# EAGLE board Triple_Axis_Accelerometer_-_Gyro_Breakout_-_MPU-6050-Panel-v12 (EAGLE 7.3.0), part 1 of 4
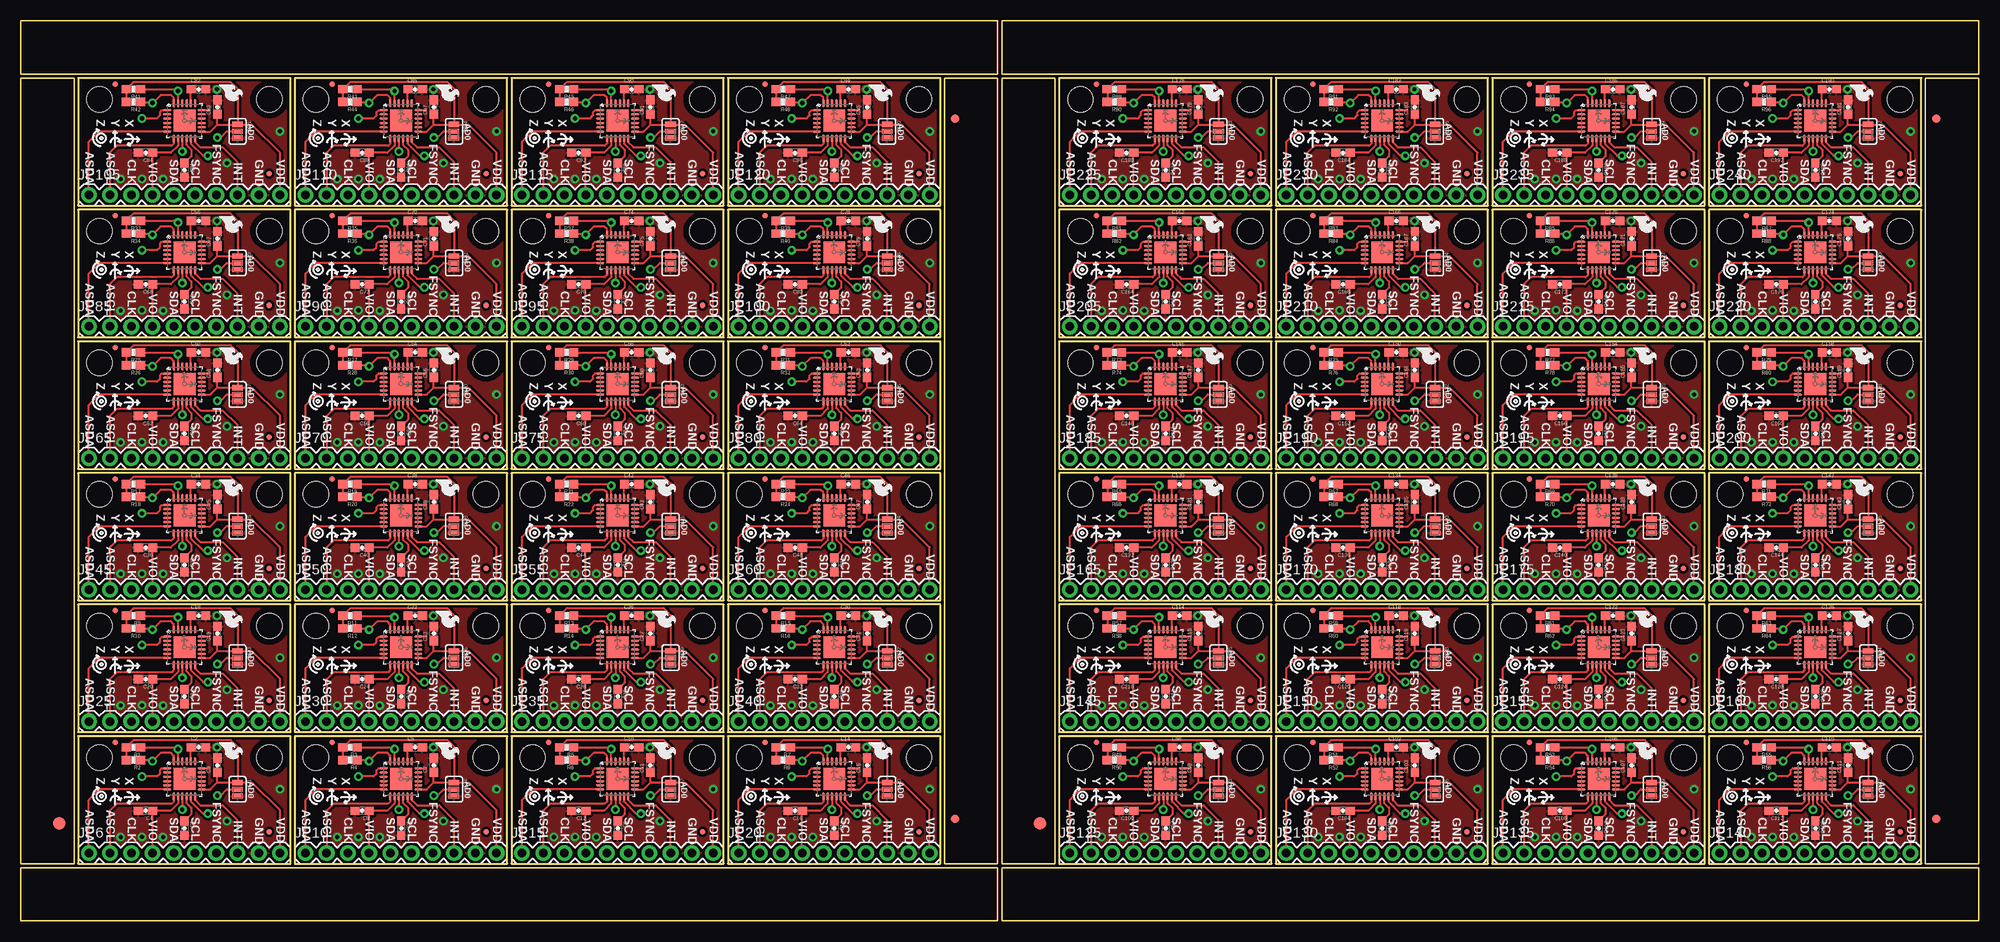
[diagram p0: board, top side]
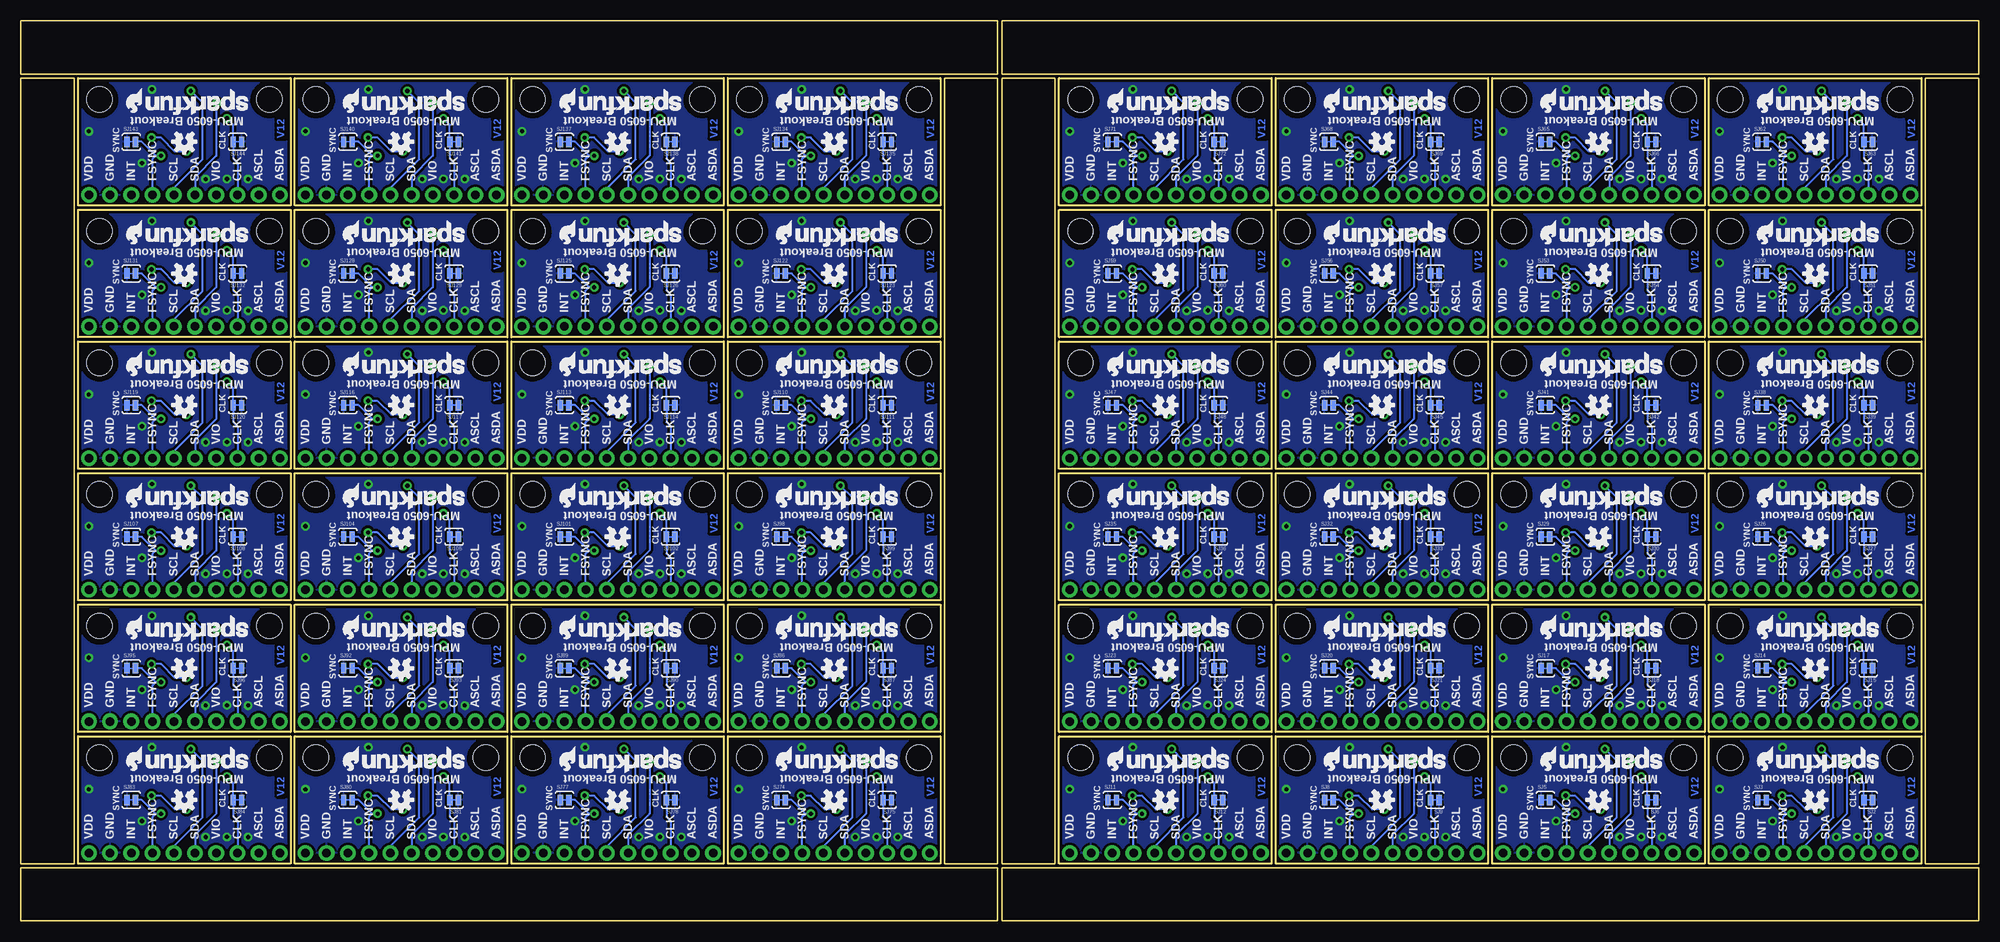
[diagram p1: board, bottom side, seen from below]

Size 234.19 x 107.7 mm. Coordinates in mm from the lower left corner, seen from the top.
Outline: 232 segments
Copper layers (1*16): Top 0.035mm / dielectric 1.5mm / Bottom 0.035mm
Design rules "SparkFun *": minimum track width 7mil, minimum drill 15mil, track to track 8mil, track to pad 8mil, pad to pad 8mil, via to via 8mil, smd to smd 8mil, copper to edge 8mil, drill to drill 8mil, minimum pad ring 12mil, minimum via ring 10mil, stop-mask expansion 4mil, vias tented up to drill 20mil, thermal gap 10mil
Net classes: 0 Default: width 0.203 mm; 1 vcc: width 0.254 mm; 2 GND: width 0.813 mm
tRestrict: area 21.4,18.4 to 22,18.7; area 47.3,18.4 to 47.9,18.7; area 73.2,18.4 to 73.8,18.7; area 99.1,18.4 to 99.7,18.7; area 21.4,34.2 to 22,34.4; area 47.3,34.2 to 47.9,34.4; area 73.2,34.2 to 73.8,34.4; area 99.1,34.2 to 99.7,34.4; area 21.4,49.9 to 22,50.2; area 47.3,49.9 to 47.9,50.2; area 73.2,49.9 to 73.8,50.2; area 99.1,49.9 to 99.7,50.2; 36 more areas

## Footprints (pad centres in the part's own frame; a part is rotated, then mirrored left to right if it is on the bottom)
0603-CAP = smd 1.1 x 1: 1 -0.85,0; 2 0.85,0
FIDUCIAL-1.5X3 = smd 1.5 x 1.5: 1 0,0
FIDUCIAL-1X2 = smd 1 x 1: 1 0,0
STAND-OFF-TIGHT = hole 3.048: 0,0
MICRO-FIDUCIAL = smd 0.635 x 0.635: 1 0,0
1X10 = drill 1.016 pad 1.88: 1 0,0; 2 2.54,0; 3 5.08,0; 4 7.62,0; 5 10.16,0; 6 12.7,0; 7 15.24,0; 8 17.78,0; 9 20.32,0; 10 22.86,0
0603-RES = smd 1.1 x 1: 1 -0.85,0; 2 0.85,0
SJ_3_PASTE2&3 = smd 0.635 x 1.27: 1 -0.813,0; 2 0,0; 3 0.813,0
SJ_2S-TRACE = smd 0.635 x 1.27: 1 -0.508,0; 2 0.508,0
QFN-24-4MM2 = smd 1.016 x 0.254: 1 -2.066,1.257; 2 -2.066,0.75; 3 -2.066,0.247; 4 -2.066,-0.287; 5 -2.066,-0.792; 6 -2.066,-1.297; 13 2.086,-1.297; 14 2.086,-0.792; 15 2.086,-0.287; 16 2.086,0.247; 17 2.086,0.75; 18 2.086,1.257 | smd 0.254 x 1.016: 7 -1.267,-2.122; 8 -0.762,-2.122; 9 -0.258,-2.122; 10 0.278,-2.122; 11 0.78,-2.122; 12 1.287,-2.122; 19 1.287,2.082; 20 0.78,2.082; 21 0.278,2.082; 22 -0.258,2.082; 23 -0.762,2.082; 24 -1.267,2.082 | smd 2.616 x 2.616: P$1 0.02,-0.01

## Placement (x,y rotation side)
C1  0.1uF  [0603-CAP]  19.58,11.1 270 top
C2  2.2nF  [0603-CAP]  21.26,20.78 0 top
C3  0.1uF  [0603-CAP]  23.5,18.64 90 top
C4  10nF  [0603-CAP]  14.91,13.18 180 top
C5  0.1uF  [0603-CAP]  45.49,11.1 270 top
C6  2.2nF  [0603-CAP]  47.17,20.78 0 top
C7  0.1uF  [0603-CAP]  49.4,18.64 90 top
C8  10nF  [0603-CAP]  40.82,13.18 180 top
C9  0.1uF  [0603-CAP]  71.4,11.1 270 top
C10  2.2nF  [0603-CAP]  73.08,20.78 0 top
C11  0.1uF  [0603-CAP]  75.31,18.64 90 top
C12  10nF  [0603-CAP]  66.73,13.18 180 top
C13  0.1uF  [0603-CAP]  97.31,11.1 270 top
C14  2.2nF  [0603-CAP]  98.98,20.78 0 top
C15  0.1uF  [0603-CAP]  101.22,18.64 90 top
C16  10nF  [0603-CAP]  92.63,13.18 180 top
C17  0.1uF  [0603-CAP]  19.58,26.85 270 top
C18  2.2nF  [0603-CAP]  21.26,36.53 0 top
C19  0.1uF  [0603-CAP]  23.5,34.39 90 top
C20  10nF  [0603-CAP]  14.91,28.93 180 top
C21  0.1uF  [0603-CAP]  45.49,26.85 270 top
C22  2.2nF  [0603-CAP]  47.17,36.53 0 top
C23  0.1uF  [0603-CAP]  49.4,34.39 90 top
C24  10nF  [0603-CAP]  40.82,28.93 180 top
C25  0.1uF  [0603-CAP]  71.4,26.85 270 top
C26  2.2nF  [0603-CAP]  73.08,36.53 0 top
C27  0.1uF  [0603-CAP]  75.31,34.39 90 top
C28  10nF  [0603-CAP]  66.73,28.93 180 top
C29  0.1uF  [0603-CAP]  97.31,26.85 270 top
C30  2.2nF  [0603-CAP]  98.98,36.53 0 top
C31  0.1uF  [0603-CAP]  101.22,34.39 90 top
C32  10nF  [0603-CAP]  92.63,28.93 180 top
C33  0.1uF  [0603-CAP]  19.58,42.6 270 top
C34  2.2nF  [0603-CAP]  21.26,52.27 0 top
C35  0.1uF  [0603-CAP]  23.5,50.14 90 top
C36  10nF  [0603-CAP]  14.91,44.68 180 top
C37  0.1uF  [0603-CAP]  45.49,42.6 270 top
C38  2.2nF  [0603-CAP]  47.17,52.27 0 top
C39  0.1uF  [0603-CAP]  49.4,50.14 90 top
C40  10nF  [0603-CAP]  40.82,44.68 180 top
C41  0.1uF  [0603-CAP]  71.4,42.6 270 top
C42  2.2nF  [0603-CAP]  73.08,52.27 0 top
C43  0.1uF  [0603-CAP]  75.31,50.14 90 top
C44  10nF  [0603-CAP]  66.73,44.68 180 top
C45  0.1uF  [0603-CAP]  97.31,42.6 270 top
C46  2.2nF  [0603-CAP]  98.98,52.27 0 top
C47  0.1uF  [0603-CAP]  101.22,50.14 90 top
C48  10nF  [0603-CAP]  92.63,44.68 180 top
C49  0.1uF  [0603-CAP]  19.58,58.34 270 top
C50  2.2nF  [0603-CAP]  21.26,68.02 0 top
C51  0.1uF  [0603-CAP]  23.5,65.89 90 top
C52  10nF  [0603-CAP]  14.91,60.43 180 top
C53  0.1uF  [0603-CAP]  45.49,58.34 270 top
C54  2.2nF  [0603-CAP]  47.17,68.02 0 top
C55  0.1uF  [0603-CAP]  49.4,65.89 90 top
C56  10nF  [0603-CAP]  40.82,60.43 180 top
C57  0.1uF  [0603-CAP]  71.4,58.34 270 top
C58  2.2nF  [0603-CAP]  73.08,68.02 0 top
C59  0.1uF  [0603-CAP]  75.31,65.89 90 top
C60  10nF  [0603-CAP]  66.73,60.43 180 top
C61  0.1uF  [0603-CAP]  97.31,58.34 270 top
C62  2.2nF  [0603-CAP]  98.98,68.02 0 top
C63  0.1uF  [0603-CAP]  101.22,65.89 90 top
C64  10nF  [0603-CAP]  92.63,60.43 180 top
C65  0.1uF  [0603-CAP]  19.58,74.09 270 top
C66  2.2nF  [0603-CAP]  21.26,83.77 0 top
C67  0.1uF  [0603-CAP]  23.5,81.64 90 top
C68  10nF  [0603-CAP]  14.91,76.17 180 top
C69  0.1uF  [0603-CAP]  45.49,74.09 270 top
C70  2.2nF  [0603-CAP]  47.17,83.77 0 top
C71  0.1uF  [0603-CAP]  49.4,81.64 90 top
C72  10nF  [0603-CAP]  40.82,76.17 180 top
C73  0.1uF  [0603-CAP]  71.4,74.09 270 top
C74  2.2nF  [0603-CAP]  73.08,83.77 0 top
C75  0.1uF  [0603-CAP]  75.31,81.64 90 top
C76  10nF  [0603-CAP]  66.73,76.17 180 top
C77  0.1uF  [0603-CAP]  97.31,74.09 270 top
C78  2.2nF  [0603-CAP]  98.98,83.77 0 top
C79  0.1uF  [0603-CAP]  101.22,81.64 90 top
C80  10nF  [0603-CAP]  92.63,76.17 180 top
C81  0.1uF  [0603-CAP]  19.58,89.84 270 top
C82  2.2nF  [0603-CAP]  21.26,99.52 0 top
C83  0.1uF  [0603-CAP]  23.5,97.38 90 top
C84  10nF  [0603-CAP]  14.91,91.92 180 top
C85  0.1uF  [0603-CAP]  45.49,89.84 270 top
C86  2.2nF  [0603-CAP]  47.17,99.52 0 top
C87  0.1uF  [0603-CAP]  49.4,97.38 90 top
C88  10nF  [0603-CAP]  40.82,91.92 180 top
C89  0.1uF  [0603-CAP]  71.4,89.84 270 top
C90  2.2nF  [0603-CAP]  73.08,99.52 0 top
C91  0.1uF  [0603-CAP]  75.31,97.38 90 top
C92  10nF  [0603-CAP]  66.73,91.92 180 top
C93  0.1uF  [0603-CAP]  97.31,89.84 270 top
C94  2.2nF  [0603-CAP]  98.98,99.52 0 top
C95  0.1uF  [0603-CAP]  101.22,97.38 90 top
C96  10nF  [0603-CAP]  92.63,91.92 180 top
C97  0.1uF  [0603-CAP]  136.93,11.1 270 top
C98  2.2nF  [0603-CAP]  138.61,20.78 0 top
C99  0.1uF  [0603-CAP]  140.84,18.64 90 top
C100  10nF  [0603-CAP]  132.26,13.18 180 top
C101  0.1uF  [0603-CAP]  162.84,11.1 270 top
C102  2.2nF  [0603-CAP]  164.52,20.78 0 top
C103  0.1uF  [0603-CAP]  166.75,18.64 90 top
C104  10nF  [0603-CAP]  158.17,13.18 180 top
C105  0.1uF  [0603-CAP]  188.75,11.1 270 top
C106  2.2nF  [0603-CAP]  190.42,20.78 0 top
C107  0.1uF  [0603-CAP]  192.66,18.64 90 top
C108  10nF  [0603-CAP]  184.07,13.18 180 top
C109  0.1uF  [0603-CAP]  214.66,11.1 270 top
C110  2.2nF  [0603-CAP]  216.33,20.78 0 top
C111  0.1uF  [0603-CAP]  218.57,18.64 90 top
C112  10nF  [0603-CAP]  209.98,13.18 180 top
C113  0.1uF  [0603-CAP]  136.93,26.85 270 top
C114  2.2nF  [0603-CAP]  138.61,36.53 0 top
C115  0.1uF  [0603-CAP]  140.84,34.39 90 top
C116  10nF  [0603-CAP]  132.26,28.93 180 top
C117  0.1uF  [0603-CAP]  162.84,26.85 270 top
C118  2.2nF  [0603-CAP]  164.52,36.53 0 top
C119  0.1uF  [0603-CAP]  166.75,34.39 90 top
C120  10nF  [0603-CAP]  158.17,28.93 180 top
C121  0.1uF  [0603-CAP]  188.75,26.85 270 top
C122  2.2nF  [0603-CAP]  190.42,36.53 0 top
C123  0.1uF  [0603-CAP]  192.66,34.39 90 top
C124  10nF  [0603-CAP]  184.07,28.93 180 top
C125  0.1uF  [0603-CAP]  214.66,26.85 270 top
C126  2.2nF  [0603-CAP]  216.33,36.53 0 top
C127  0.1uF  [0603-CAP]  218.57,34.39 90 top
C128  10nF  [0603-CAP]  209.98,28.93 180 top
C129  0.1uF  [0603-CAP]  136.93,42.6 270 top
C130  2.2nF  [0603-CAP]  138.61,52.27 0 top
C131  0.1uF  [0603-CAP]  140.84,50.14 90 top
C132  10nF  [0603-CAP]  132.26,44.68 180 top
C133  0.1uF  [0603-CAP]  162.84,42.6 270 top
C134  2.2nF  [0603-CAP]  164.52,52.27 0 top
C135  0.1uF  [0603-CAP]  166.75,50.14 90 top
C136  10nF  [0603-CAP]  158.17,44.68 180 top
C137  0.1uF  [0603-CAP]  188.75,42.6 270 top
C138  2.2nF  [0603-CAP]  190.42,52.27 0 top
C139  0.1uF  [0603-CAP]  192.66,50.14 90 top
C140  10nF  [0603-CAP]  184.07,44.68 180 top
C141  0.1uF  [0603-CAP]  214.66,42.6 270 top
C142  2.2nF  [0603-CAP]  216.33,52.27 0 top
C143  0.1uF  [0603-CAP]  218.57,50.14 90 top
C144  10nF  [0603-CAP]  209.98,44.68 180 top
C145  0.1uF  [0603-CAP]  136.93,58.34 270 top
C146  2.2nF  [0603-CAP]  138.61,68.02 0 top
C147  0.1uF  [0603-CAP]  140.84,65.89 90 top
C148  10nF  [0603-CAP]  132.26,60.43 180 top
C149  0.1uF  [0603-CAP]  162.84,58.34 270 top
C150  2.2nF  [0603-CAP]  164.52,68.02 0 top
C151  0.1uF  [0603-CAP]  166.75,65.89 90 top
C152  10nF  [0603-CAP]  158.17,60.43 180 top
C153  0.1uF  [0603-CAP]  188.75,58.34 270 top
C154  2.2nF  [0603-CAP]  190.42,68.02 0 top
C155  0.1uF  [0603-CAP]  192.66,65.89 90 top
C156  10nF  [0603-CAP]  184.07,60.43 180 top
C157  0.1uF  [0603-CAP]  214.66,58.34 270 top
C158  2.2nF  [0603-CAP]  216.33,68.02 0 top
C159  0.1uF  [0603-CAP]  218.57,65.89 90 top
C160  10nF  [0603-CAP]  209.98,60.43 180 top
C161  0.1uF  [0603-CAP]  136.93,74.09 270 top
C162  2.2nF  [0603-CAP]  138.61,83.77 0 top
C163  0.1uF  [0603-CAP]  140.84,81.64 90 top
C164  10nF  [0603-CAP]  132.26,76.17 180 top
C165  0.1uF  [0603-CAP]  162.84,74.09 270 top
C166  2.2nF  [0603-CAP]  164.52,83.77 0 top
C167  0.1uF  [0603-CAP]  166.75,81.64 90 top
C168  10nF  [0603-CAP]  158.17,76.17 180 top
C169  0.1uF  [0603-CAP]  188.75,74.09 270 top
C170  2.2nF  [0603-CAP]  190.42,83.77 0 top
C171  0.1uF  [0603-CAP]  192.66,81.64 90 top
C172  10nF  [0603-CAP]  184.07,76.17 180 top
C173  0.1uF  [0603-CAP]  214.66,74.09 270 top
C174  2.2nF  [0603-CAP]  216.33,83.77 0 top
C175  0.1uF  [0603-CAP]  218.57,81.64 90 top
C176  10nF  [0603-CAP]  209.98,76.17 180 top
C177  0.1uF  [0603-CAP]  136.93,89.84 270 top
C178  2.2nF  [0603-CAP]  138.61,99.52 0 top
C179  0.1uF  [0603-CAP]  140.84,97.38 90 top
C180  10nF  [0603-CAP]  132.26,91.92 180 top
C181  0.1uF  [0603-CAP]  162.84,89.84 270 top
C182  2.2nF  [0603-CAP]  164.52,99.52 0 top
C183  0.1uF  [0603-CAP]  166.75,97.38 90 top
C184  10nF  [0603-CAP]  158.17,91.92 180 top
C185  0.1uF  [0603-CAP]  188.75,89.84 270 top
C186  2.2nF  [0603-CAP]  190.42,99.52 0 top
C187  0.1uF  [0603-CAP]  192.66,97.38 90 top
C188  10nF  [0603-CAP]  184.07,91.92 180 top
C189  0.1uF  [0603-CAP]  214.66,89.84 270 top
C190  2.2nF  [0603-CAP]  216.33,99.52 0 top
C191  0.1uF  [0603-CAP]  218.57,97.38 90 top
C192  10nF  [0603-CAP]  209.98,91.92 180 top
E$1  [FIDUCIAL-1.5X3]  4.57,11.68 0 top
E$2  [FIDUCIAL-1X2]  229.11,12.19 0 top
E$3  [FIDUCIAL-1X2]  229.11,96.01 180 top
E$4  [FIDUCIAL-1X2]  111.76,12.19 0 top
E$5  [FIDUCIAL-1X2]  111.76,96.01 180 top
E$6  [FIDUCIAL-1.5X3]  121.92,11.68 0 top
JP1  STAND-OFFTIGHT  [STAND-OFF-TIGHT]  55.63,19.56 270 top
JP2  FIDUCIALUFIDUCIAL  [MICRO-FIDUCIAL]  11.3,21.39 270 top
JP3  STAND-OFFTIGHT  [STAND-OFF-TIGHT]  29.72,19.56 270 top
JP4  STAND-OFFTIGHT  [STAND-OFF-TIGHT]  9.4,19.56 270 top
JP5  FIDUCIALUFIDUCIAL  [MICRO-FIDUCIAL]  29.72,10.67 270 top
JP6  M10"  [1X10]  8.13,8.13 0 top
JP7  STAND-OFFTIGHT  [STAND-OFF-TIGHT]  35.31,19.56 270 top
JP8  FIDUCIALUFIDUCIAL  [MICRO-FIDUCIAL]  37.21,21.39 270 top
JP9  FIDUCIALUFIDUCIAL  [MICRO-FIDUCIAL]  55.63,10.67 270 top
JP10  M10"  [1X10]  34.04,8.13 0 top
JP11  STAND-OFFTIGHT  [STAND-OFF-TIGHT]  81.53,19.56 270 top
JP12  STAND-OFFTIGHT  [STAND-OFF-TIGHT]  61.21,19.56 270 top
JP13  FIDUCIALUFIDUCIAL  [MICRO-FIDUCIAL]  63.12,21.39 270 top
JP14  FIDUCIALUFIDUCIAL  [MICRO-FIDUCIAL]  81.53,10.67 270 top
JP15  M10"  [1X10]  59.94,8.13 0 top
JP16  STAND-OFFTIGHT  [STAND-OFF-TIGHT]  107.44,19.56 270 top
JP17  STAND-OFFTIGHT  [STAND-OFF-TIGHT]  87.12,19.56 270 top
JP18  FIDUCIALUFIDUCIAL  [MICRO-FIDUCIAL]  89.03,21.39 270 top
JP19  FIDUCIALUFIDUCIAL  [MICRO-FIDUCIAL]  107.44,10.67 270 top
JP20  M10"  [1X10]  85.85,8.13 0 top
JP21  STAND-OFFTIGHT  [STAND-OFF-TIGHT]  29.72,35.31 270 top
JP22  STAND-OFFTIGHT  [STAND-OFF-TIGHT]  9.4,35.31 270 top
JP23  FIDUCIALUFIDUCIAL  [MICRO-FIDUCIAL]  11.3,37.13 270 top
JP24  FIDUCIALUFIDUCIAL  [MICRO-FIDUCIAL]  29.72,26.42 270 top
JP25  M10"  [1X10]  8.13,23.88 0 top
JP26  STAND-OFFTIGHT  [STAND-OFF-TIGHT]  55.63,35.31 270 top
JP27  STAND-OFFTIGHT  [STAND-OFF-TIGHT]  35.31,35.31 270 top
JP28  FIDUCIALUFIDUCIAL  [MICRO-FIDUCIAL]  37.21,37.13 270 top
JP29  FIDUCIALUFIDUCIAL  [MICRO-FIDUCIAL]  55.63,26.42 270 top
JP30  M10"  [1X10]  34.04,23.88 0 top
JP31  STAND-OFFTIGHT  [STAND-OFF-TIGHT]  81.53,35.31 270 top
JP32  STAND-OFFTIGHT  [STAND-OFF-TIGHT]  61.21,35.31 270 top
JP33  FIDUCIALUFIDUCIAL  [MICRO-FIDUCIAL]  63.12,37.13 270 top
JP34  FIDUCIALUFIDUCIAL  [MICRO-FIDUCIAL]  81.53,26.42 270 top
JP35  M10"  [1X10]  59.94,23.88 0 top
JP36  STAND-OFFTIGHT  [STAND-OFF-TIGHT]  107.44,35.31 270 top
JP37  STAND-OFFTIGHT  [STAND-OFF-TIGHT]  87.12,35.31 270 top
JP38  FIDUCIALUFIDUCIAL  [MICRO-FIDUCIAL]  89.03,37.13 270 top
JP39  FIDUCIALUFIDUCIAL  [MICRO-FIDUCIAL]  107.44,26.42 270 top
JP40  M10"  [1X10]  85.85,23.88 0 top
JP41  STAND-OFFTIGHT  [STAND-OFF-TIGHT]  29.72,51.05 270 top
JP42  STAND-OFFTIGHT  [STAND-OFF-TIGHT]  9.4,51.05 270 top
JP43  FIDUCIALUFIDUCIAL  [MICRO-FIDUCIAL]  11.3,52.88 270 top
JP44  FIDUCIALUFIDUCIAL  [MICRO-FIDUCIAL]  29.72,42.16 270 top
JP45  M10"  [1X10]  8.13,39.62 0 top
JP46  STAND-OFFTIGHT  [STAND-OFF-TIGHT]  55.63,51.05 270 top
JP47  STAND-OFFTIGHT  [STAND-OFF-TIGHT]  35.31,51.05 270 top
JP48  FIDUCIALUFIDUCIAL  [MICRO-FIDUCIAL]  37.21,52.88 270 top
JP49  FIDUCIALUFIDUCIAL  [MICRO-FIDUCIAL]  55.63,42.16 270 top
JP50  M10"  [1X10]  34.04,39.62 0 top
JP51  STAND-OFFTIGHT  [STAND-OFF-TIGHT]  81.53,51.05 270 top
JP52  STAND-OFFTIGHT  [STAND-OFF-TIGHT]  61.21,51.05 270 top
JP53  FIDUCIALUFIDUCIAL  [MICRO-FIDUCIAL]  63.12,52.88 270 top
JP54  FIDUCIALUFIDUCIAL  [MICRO-FIDUCIAL]  81.53,42.16 270 top
JP55  M10"  [1X10]  59.94,39.62 0 top
JP56  STAND-OFFTIGHT  [STAND-OFF-TIGHT]  107.44,51.05 270 top
JP57  STAND-OFFTIGHT  [STAND-OFF-TIGHT]  87.12,51.05 270 top
JP58  FIDUCIALUFIDUCIAL  [MICRO-FIDUCIAL]  89.03,52.88 270 top
JP59  FIDUCIALUFIDUCIAL  [MICRO-FIDUCIAL]  107.44,42.16 270 top
JP60  M10"  [1X10]  85.85,39.62 0 top
JP61  STAND-OFFTIGHT  [STAND-OFF-TIGHT]  29.72,66.8 270 top
JP62  STAND-OFFTIGHT  [STAND-OFF-TIGHT]  9.4,66.8 270 top
JP63  FIDUCIALUFIDUCIAL  [MICRO-FIDUCIAL]  11.3,68.63 270 top
JP64  FIDUCIALUFIDUCIAL  [MICRO-FIDUCIAL]  29.72,57.91 270 top
JP65  M10"  [1X10]  8.13,55.37 0 top
JP66  STAND-OFFTIGHT  [STAND-OFF-TIGHT]  55.63,66.8 270 top
JP67  STAND-OFFTIGHT  [STAND-OFF-TIGHT]  35.31,66.8 270 top
JP68  FIDUCIALUFIDUCIAL  [MICRO-FIDUCIAL]  37.21,68.63 270 top
JP69  FIDUCIALUFIDUCIAL  [MICRO-FIDUCIAL]  55.63,57.91 270 top
JP70  M10"  [1X10]  34.04,55.37 0 top
JP71  STAND-OFFTIGHT  [STAND-OFF-TIGHT]  81.53,66.8 270 top
JP72  STAND-OFFTIGHT  [STAND-OFF-TIGHT]  61.21,66.8 270 top
JP73  FIDUCIALUFIDUCIAL  [MICRO-FIDUCIAL]  63.12,68.63 270 top
JP74  FIDUCIALUFIDUCIAL  [MICRO-FIDUCIAL]  81.53,57.91 270 top
JP75  M10"  [1X10]  59.94,55.37 0 top
JP76  STAND-OFFTIGHT  [STAND-OFF-TIGHT]  107.44,66.8 270 top
JP77  STAND-OFFTIGHT  [STAND-OFF-TIGHT]  87.12,66.8 270 top
JP78  FIDUCIALUFIDUCIAL  [MICRO-FIDUCIAL]  89.03,68.63 270 top
JP79  FIDUCIALUFIDUCIAL  [MICRO-FIDUCIAL]  107.44,57.91 270 top
JP80  M10"  [1X10]  85.85,55.37 0 top
JP81  STAND-OFFTIGHT  [STAND-OFF-TIGHT]  29.72,82.55 270 top
JP82  STAND-OFFTIGHT  [STAND-OFF-TIGHT]  9.4,82.55 270 top
JP83  FIDUCIALUFIDUCIAL  [MICRO-FIDUCIAL]  11.3,84.38 270 top
JP84  FIDUCIALUFIDUCIAL  [MICRO-FIDUCIAL]  29.72,73.66 270 top
JP85  M10"  [1X10]  8.13,71.12 0 top
JP86  STAND-OFFTIGHT  [STAND-OFF-TIGHT]  55.63,82.55 270 top
JP87  STAND-OFFTIGHT  [STAND-OFF-TIGHT]  35.31,82.55 270 top
JP88  FIDUCIALUFIDUCIAL  [MICRO-FIDUCIAL]  37.21,84.38 270 top
JP89  FIDUCIALUFIDUCIAL  [MICRO-FIDUCIAL]  55.63,73.66 270 top
JP90  M10"  [1X10]  34.04,71.12 0 top
JP91  STAND-OFFTIGHT  [STAND-OFF-TIGHT]  81.53,82.55 270 top
JP92  STAND-OFFTIGHT  [STAND-OFF-TIGHT]  61.21,82.55 270 top
JP93  FIDUCIALUFIDUCIAL  [MICRO-FIDUCIAL]  63.12,84.38 270 top
JP94  FIDUCIALUFIDUCIAL  [MICRO-FIDUCIAL]  81.53,73.66 270 top
JP95  M10"  [1X10]  59.94,71.12 0 top
JP96  STAND-OFFTIGHT  [STAND-OFF-TIGHT]  107.44,82.55 270 top
JP97  STAND-OFFTIGHT  [STAND-OFF-TIGHT]  87.12,82.55 270 top
JP98  FIDUCIALUFIDUCIAL  [MICRO-FIDUCIAL]  89.03,84.38 270 top
JP99  FIDUCIALUFIDUCIAL  [MICRO-FIDUCIAL]  107.44,73.66 270 top
JP100  M10"  [1X10]  85.85,71.12 0 top
JP101  STAND-OFFTIGHT  [STAND-OFF-TIGHT]  29.72,98.3 270 top
JP102  STAND-OFFTIGHT  [STAND-OFF-TIGHT]  9.4,98.3 270 top
JP103  FIDUCIALUFIDUCIAL  [MICRO-FIDUCIAL]  11.3,100.13 270 top
JP104  FIDUCIALUFIDUCIAL  [MICRO-FIDUCIAL]  29.72,89.41 270 top
JP105  M10"  [1X10]  8.13,86.87 0 top
JP106  STAND-OFFTIGHT  [STAND-OFF-TIGHT]  55.63,98.3 270 top
JP107  STAND-OFFTIGHT  [STAND-OFF-TIGHT]  35.31,98.3 270 top
JP108  FIDUCIALUFIDUCIAL  [MICRO-FIDUCIAL]  37.21,100.13 270 top
JP109  FIDUCIALUFIDUCIAL  [MICRO-FIDUCIAL]  55.63,89.41 270 top
JP110  M10"  [1X10]  34.04,86.87 0 top
JP111  STAND-OFFTIGHT  [STAND-OFF-TIGHT]  81.53,98.3 270 top
JP112  STAND-OFFTIGHT  [STAND-OFF-TIGHT]  61.21,98.3 270 top
JP113  FIDUCIALUFIDUCIAL  [MICRO-FIDUCIAL]  63.12,100.13 270 top
JP114  FIDUCIALUFIDUCIAL  [MICRO-FIDUCIAL]  81.53,89.41 270 top
JP115  M10"  [1X10]  59.94,86.87 0 top
JP116  STAND-OFFTIGHT  [STAND-OFF-TIGHT]  107.44,98.3 270 top
JP117  STAND-OFFTIGHT  [STAND-OFF-TIGHT]  87.12,98.3 270 top
JP118  FIDUCIALUFIDUCIAL  [MICRO-FIDUCIAL]  89.03,100.13 270 top
JP119  FIDUCIALUFIDUCIAL  [MICRO-FIDUCIAL]  107.44,89.41 270 top
JP120  M10"  [1X10]  85.85,86.87 0 top
JP121  STAND-OFFTIGHT  [STAND-OFF-TIGHT]  147.07,19.56 270 top
JP122  STAND-OFFTIGHT  [STAND-OFF-TIGHT]  126.75,19.56 270 top
JP123  FIDUCIALUFIDUCIAL  [MICRO-FIDUCIAL]  128.65,21.39 270 top
JP124  FIDUCIALUFIDUCIAL  [MICRO-FIDUCIAL]  147.07,10.67 270 top
JP125  M10"  [1X10]  125.48,8.13 0 top
JP126  STAND-OFFTIGHT  [STAND-OFF-TIGHT]  172.97,19.56 270 top
JP127  STAND-OFFTIGHT  [STAND-OFF-TIGHT]  152.65,19.56 270 top
JP128  FIDUCIALUFIDUCIAL  [MICRO-FIDUCIAL]  154.56,21.39 270 top
JP129  FIDUCIALUFIDUCIAL  [MICRO-FIDUCIAL]  172.97,10.67 270 top
JP130  M10"  [1X10]  151.38,8.13 0 top
JP131  STAND-OFFTIGHT  [STAND-OFF-TIGHT]  198.88,19.56 270 top
JP132  STAND-OFFTIGHT  [STAND-OFF-TIGHT]  178.56,19.56 270 top
JP133  FIDUCIALUFIDUCIAL  [MICRO-FIDUCIAL]  180.47,21.39 270 top
JP134  FIDUCIALUFIDUCIAL  [MICRO-FIDUCIAL]  198.88,10.67 270 top
JP135  M10"  [1X10]  177.29,8.13 0 top
JP136  STAND-OFFTIGHT  [STAND-OFF-TIGHT]  224.79,19.56 270 top
JP137  STAND-OFFTIGHT  [STAND-OFF-TIGHT]  204.47,19.56 270 top
JP138  FIDUCIALUFIDUCIAL  [MICRO-FIDUCIAL]  206.38,21.39 270 top
JP139  FIDUCIALUFIDUCIAL  [MICRO-FIDUCIAL]  224.79,10.67 270 top
JP140  M10"  [1X10]  203.2,8.13 0 top
JP141  STAND-OFFTIGHT  [STAND-OFF-TIGHT]  147.07,35.31 270 top
JP142  STAND-OFFTIGHT  [STAND-OFF-TIGHT]  126.75,35.31 270 top
JP143  FIDUCIALUFIDUCIAL  [MICRO-FIDUCIAL]  128.65,37.13 270 top
JP144  FIDUCIALUFIDUCIAL  [MICRO-FIDUCIAL]  147.07,26.42 270 top
JP145  M10"  [1X10]  125.48,23.88 0 top
JP146  STAND-OFFTIGHT  [STAND-OFF-TIGHT]  172.97,35.31 270 top
JP147  STAND-OFFTIGHT  [STAND-OFF-TIGHT]  152.65,35.31 270 top
JP148  FIDUCIALUFIDUCIAL  [MICRO-FIDUCIAL]  154.56,37.13 270 top
JP149  FIDUCIALUFIDUCIAL  [MICRO-FIDUCIAL]  172.97,26.42 270 top
JP150  M10"  [1X10]  151.38,23.88 0 top
JP151  STAND-OFFTIGHT  [STAND-OFF-TIGHT]  198.88,35.31 270 top
JP152  STAND-OFFTIGHT  [STAND-OFF-TIGHT]  178.56,35.31 270 top
JP153  FIDUCIALUFIDUCIAL  [MICRO-FIDUCIAL]  180.47,37.13 270 top
JP154  FIDUCIALUFIDUCIAL  [MICRO-FIDUCIAL]  198.88,26.42 270 top
JP155  M10"  [1X10]  177.29,23.88 0 top
JP156  STAND-OFFTIGHT  [STAND-OFF-TIGHT]  224.79,35.31 270 top
JP157  STAND-OFFTIGHT  [STAND-OFF-TIGHT]  204.47,35.31 270 top
JP158  FIDUCIALUFIDUCIAL  [MICRO-FIDUCIAL]  206.38,37.13 270 top
JP159  FIDUCIALUFIDUCIAL  [MICRO-FIDUCIAL]  224.79,26.42 270 top
JP160  M10"  [1X10]  203.2,23.88 0 top
JP161  STAND-OFFTIGHT  [STAND-OFF-TIGHT]  147.07,51.05 270 top
JP162  STAND-OFFTIGHT  [STAND-OFF-TIGHT]  126.75,51.05 270 top
JP163  FIDUCIALUFIDUCIAL  [MICRO-FIDUCIAL]  128.65,52.88 270 top
JP164  FIDUCIALUFIDUCIAL  [MICRO-FIDUCIAL]  147.07,42.16 270 top
JP165  M10"  [1X10]  125.48,39.62 0 top
JP166  STAND-OFFTIGHT  [STAND-OFF-TIGHT]  172.97,51.05 270 top
JP167  STAND-OFFTIGHT  [STAND-OFF-TIGHT]  152.65,51.05 270 top
JP168  FIDUCIALUFIDUCIAL  [MICRO-FIDUCIAL]  154.56,52.88 270 top
JP169  FIDUCIALUFIDUCIAL  [MICRO-FIDUCIAL]  172.97,42.16 270 top
JP170  M10"  [1X10]  151.38,39.62 0 top
JP171  STAND-OFFTIGHT  [STAND-OFF-TIGHT]  198.88,51.05 270 top
JP172  STAND-OFFTIGHT  [STAND-OFF-TIGHT]  178.56,51.05 270 top
JP173  FIDUCIALUFIDUCIAL  [MICRO-FIDUCIAL]  180.47,52.88 270 top
JP174  FIDUCIALUFIDUCIAL  [MICRO-FIDUCIAL]  198.88,42.16 270 top
JP175  M10"  [1X10]  177.29,39.62 0 top
JP176  STAND-OFFTIGHT  [STAND-OFF-TIGHT]  224.79,51.05 270 top
JP177  STAND-OFFTIGHT  [STAND-OFF-TIGHT]  204.47,51.05 270 top
JP178  FIDUCIALUFIDUCIAL  [MICRO-FIDUCIAL]  206.38,52.88 270 top
JP179  FIDUCIALUFIDUCIAL  [MICRO-FIDUCIAL]  224.79,42.16 270 top
JP180  M10"  [1X10]  203.2,39.62 0 top
JP181  STAND-OFFTIGHT  [STAND-OFF-TIGHT]  147.07,66.8 270 top
JP182  STAND-OFFTIGHT  [STAND-OFF-TIGHT]  126.75,66.8 270 top
JP183  FIDUCIALUFIDUCIAL  [MICRO-FIDUCIAL]  128.65,68.63 270 top
JP184  FIDUCIALUFIDUCIAL  [MICRO-FIDUCIAL]  147.07,57.91 270 top
JP185  M10"  [1X10]  125.48,55.37 0 top
JP186  STAND-OFFTIGHT  [STAND-OFF-TIGHT]  172.97,66.8 270 top
JP187  STAND-OFFTIGHT  [STAND-OFF-TIGHT]  152.65,66.8 270 top
JP188  FIDUCIALUFIDUCIAL  [MICRO-FIDUCIAL]  154.56,68.63 270 top
JP189  FIDUCIALUFIDUCIAL  [MICRO-FIDUCIAL]  172.97,57.91 270 top
JP190  M10"  [1X10]  151.38,55.37 0 top
JP191  STAND-OFFTIGHT  [STAND-OFF-TIGHT]  198.88,66.8 270 top
JP192  STAND-OFFTIGHT  [STAND-OFF-TIGHT]  178.56,66.8 270 top
JP193  FIDUCIALUFIDUCIAL  [MICRO-FIDUCIAL]  180.47,68.63 270 top
JP194  FIDUCIALUFIDUCIAL  [MICRO-FIDUCIAL]  198.88,57.91 270 top
JP195  M10"  [1X10]  177.29,55.37 0 top
JP196  STAND-OFFTIGHT  [STAND-OFF-TIGHT]  224.79,66.8 270 top
JP197  STAND-OFFTIGHT  [STAND-OFF-TIGHT]  204.47,66.8 270 top
JP198  FIDUCIALUFIDUCIAL  [MICRO-FIDUCIAL]  206.38,68.63 270 top
JP199  FIDUCIALUFIDUCIAL  [MICRO-FIDUCIAL]  224.79,57.91 270 top
JP200  M10"  [1X10]  203.2,55.37 0 top
JP201  STAND-OFFTIGHT  [STAND-OFF-TIGHT]  147.07,82.55 270 top
JP202  STAND-OFFTIGHT  [STAND-OFF-TIGHT]  126.75,82.55 270 top
JP203  FIDUCIALUFIDUCIAL  [MICRO-FIDUCIAL]  128.65,84.38 270 top
JP204  FIDUCIALUFIDUCIAL  [MICRO-FIDUCIAL]  147.07,73.66 270 top
JP205  M10"  [1X10]  125.48,71.12 0 top
JP206  STAND-OFFTIGHT  [STAND-OFF-TIGHT]  172.97,82.55 270 top
JP207  STAND-OFFTIGHT  [STAND-OFF-TIGHT]  152.65,82.55 270 top
JP208  FIDUCIALUFIDUCIAL  [MICRO-FIDUCIAL]  154.56,84.38 270 top
JP209  FIDUCIALUFIDUCIAL  [MICRO-FIDUCIAL]  172.97,73.66 270 top
JP210  M10"  [1X10]  151.38,71.12 0 top
JP211  STAND-OFFTIGHT  [STAND-OFF-TIGHT]  198.88,82.55 270 top
JP212  STAND-OFFTIGHT  [STAND-OFF-TIGHT]  178.56,82.55 270 top
JP213  FIDUCIALUFIDUCIAL  [MICRO-FIDUCIAL]  180.47,84.38 270 top
JP214  FIDUCIALUFIDUCIAL  [MICRO-FIDUCIAL]  198.88,73.66 270 top
JP215  M10"  [1X10]  177.29,71.12 0 top
JP216  STAND-OFFTIGHT  [STAND-OFF-TIGHT]  224.79,82.55 270 top
JP217  STAND-OFFTIGHT  [STAND-OFF-TIGHT]  204.47,82.55 270 top
JP218  FIDUCIALUFIDUCIAL  [MICRO-FIDUCIAL]  206.38,84.38 270 top
JP219  FIDUCIALUFIDUCIAL  [MICRO-FIDUCIAL]  224.79,73.66 270 top
JP220  M10"  [1X10]  203.2,71.12 0 top
JP221  STAND-OFFTIGHT  [STAND-OFF-TIGHT]  147.07,98.3 270 top
JP222  STAND-OFFTIGHT  [STAND-OFF-TIGHT]  126.75,98.3 270 top
JP223  FIDUCIALUFIDUCIAL  [MICRO-FIDUCIAL]  128.65,100.13 270 top
JP224  FIDUCIALUFIDUCIAL  [MICRO-FIDUCIAL]  147.07,89.41 270 top
JP225  M10"  [1X10]  125.48,86.87 0 top
JP226  STAND-OFFTIGHT  [STAND-OFF-TIGHT]  172.97,98.3 270 top
JP227  STAND-OFFTIGHT  [STAND-OFF-TIGHT]  152.65,98.3 270 top
JP228  FIDUCIALUFIDUCIAL  [MICRO-FIDUCIAL]  154.56,100.13 270 top
JP229  FIDUCIALUFIDUCIAL  [MICRO-FIDUCIAL]  172.97,89.41 270 top
JP230  M10"  [1X10]  151.38,86.87 0 top
JP231  STAND-OFFTIGHT  [STAND-OFF-TIGHT]  198.88,98.3 270 top
JP232  STAND-OFFTIGHT  [STAND-OFF-TIGHT]  178.56,98.3 270 top
JP233  FIDUCIALUFIDUCIAL  [MICRO-FIDUCIAL]  180.47,100.13 270 top
JP234  FIDUCIALUFIDUCIAL  [MICRO-FIDUCIAL]  198.88,89.41 270 top
JP235  M10"  [1X10]  177.29,86.87 0 top
JP236  STAND-OFFTIGHT  [STAND-OFF-TIGHT]  224.79,98.3 270 top
JP237  STAND-OFFTIGHT  [STAND-OFF-TIGHT]  204.47,98.3 270 top
JP238  FIDUCIALUFIDUCIAL  [MICRO-FIDUCIAL]  206.38,100.13 270 top
JP239  FIDUCIALUFIDUCIAL  [MICRO-FIDUCIAL]  224.79,89.41 270 top
JP240  M10"  [1X10]  203.2,86.87 0 top
R1  10k  [0603-RES]  13.46,20.78 180 top
R2  10k  [0603-RES]  13.46,19.25 180 top
R3  10k  [0603-RES]  39.37,20.78 180 top
R4  10k  [0603-RES]  39.37,19.25 180 top
R5  10k  [0603-RES]  65.28,20.78 180 top
R6  10k  [0603-RES]  65.28,19.25 180 top
R7  10k  [0603-RES]  91.19,20.78 180 top
R8  10k  [0603-RES]  91.19,19.25 180 top
R9  10k  [0603-RES]  13.46,36.53 180 top
R10  10k  [0603-RES]  13.46,35 180 top
R11  10k  [0603-RES]  39.37,36.53 180 top
R12  10k  [0603-RES]  39.37,35 180 top
R13  10k  [0603-RES]  65.28,36.53 180 top
R14  10k  [0603-RES]  65.28,35 180 top
R15  10k  [0603-RES]  91.19,36.53 180 top
R16  10k  [0603-RES]  91.19,35 180 top
R17  10k  [0603-RES]  13.46,52.27 180 top
R18  10k  [0603-RES]  13.46,50.75 180 top
R19  10k  [0603-RES]  39.37,52.27 180 top
R20  10k  [0603-RES]  39.37,50.75 180 top
R21  10k  [0603-RES]  65.28,52.27 180 top
R22  10k  [0603-RES]  65.28,50.75 180 top
R23  10k  [0603-RES]  91.19,52.27 180 top
R24  10k  [0603-RES]  91.19,50.75 180 top
R25  10k  [0603-RES]  13.46,68.02 180 top
R26  10k  [0603-RES]  13.46,66.5 180 top
R27  10k  [0603-RES]  39.37,68.02 180 top
R28  10k  [0603-RES]  39.37,66.5 180 top
R29  10k  [0603-RES]  65.28,68.02 180 top
R30  10k  [0603-RES]  65.28,66.5 180 top
R31  10k  [0603-RES]  91.19,68.02 180 top
R32  10k  [0603-RES]  91.19,66.5 180 top
R33  10k  [0603-RES]  13.46,83.77 180 top
R34  10k  [0603-RES]  13.46,82.25 180 top
R35  10k  [0603-RES]  39.37,83.77 180 top
R36  10k  [0603-RES]  39.37,82.25 180 top
R37  10k  [0603-RES]  65.28,83.77 180 top
R38  10k  [0603-RES]  65.28,82.25 180 top
R39  10k  [0603-RES]  91.19,83.77 180 top
R40  10k  [0603-RES]  91.19,82.25 180 top
R41  10k  [0603-RES]  13.46,99.52 180 top
R42  10k  [0603-RES]  13.46,97.99 180 top
R43  10k  [0603-RES]  39.37,99.52 180 top
R44  10k  [0603-RES]  39.37,97.99 180 top
R45  10k  [0603-RES]  65.28,99.52 180 top
R46  10k  [0603-RES]  65.28,97.99 180 top
R47  10k  [0603-RES]  91.19,99.52 180 top
R48  10k  [0603-RES]  91.19,97.99 180 top
R49  10k  [0603-RES]  130.81,20.78 180 top
R50  10k  [0603-RES]  130.81,19.25 180 top
R51  10k  [0603-RES]  156.72,20.78 180 top
R52  10k  [0603-RES]  156.72,19.25 180 top
R53  10k  [0603-RES]  182.63,20.78 180 top
R54  10k  [0603-RES]  182.63,19.25 180 top
R55  10k  [0603-RES]  208.53,20.78 180 top
R56  10k  [0603-RES]  208.53,19.25 180 top
R57  10k  [0603-RES]  130.81,36.53 180 top
R58  10k  [0603-RES]  130.81,35 180 top
R59  10k  [0603-RES]  156.72,36.53 180 top
R60  10k  [0603-RES]  156.72,35 180 top
R61  10k  [0603-RES]  182.63,36.53 180 top
R62  10k  [0603-RES]  182.63,35 180 top
R63  10k  [0603-RES]  208.53,36.53 180 top
R64  10k  [0603-RES]  208.53,35 180 top
R65  10k  [0603-RES]  130.81,52.27 180 top
R66  10k  [0603-RES]  130.81,50.75 180 top
R67  10k  [0603-RES]  156.72,52.27 180 top
R68  10k  [0603-RES]  156.72,50.75 180 top
R69  10k  [0603-RES]  182.63,52.27 180 top
R70  10k  [0603-RES]  182.63,50.75 180 top
R71  10k  [0603-RES]  208.53,52.27 180 top
R72  10k  [0603-RES]  208.53,50.75 180 top
R73  10k  [0603-RES]  130.81,68.02 180 top
R74  10k  [0603-RES]  130.81,66.5 180 top
R75  10k  [0603-RES]  156.72,68.02 180 top
R76  10k  [0603-RES]  156.72,66.5 180 top
R77  10k  [0603-RES]  182.63,68.02 180 top
R78  10k  [0603-RES]  182.63,66.5 180 top
R79  10k  [0603-RES]  208.53,68.02 180 top
R80  10k  [0603-RES]  208.53,66.5 180 top
R81  10k  [0603-RES]  130.81,83.77 180 top
R82  10k  [0603-RES]  130.81,82.25 180 top
R83  10k  [0603-RES]  156.72,83.77 180 top
R84  10k  [0603-RES]  156.72,82.25 180 top
R85  10k  [0603-RES]  182.63,83.77 180 top
R86  10k  [0603-RES]  182.63,82.25 180 top
R87  10k  [0603-RES]  208.53,83.77 180 top
R88  10k  [0603-RES]  208.53,82.25 180 top
R89  10k  [0603-RES]  130.81,99.52 180 top
R90  10k  [0603-RES]  130.81,97.99 180 top
R91  10k  [0603-RES]  156.72,99.52 180 top
R92  10k  [0603-RES]  156.72,97.99 180 top
R93  10k  [0603-RES]  182.63,99.52 180 top
R94  10k  [0603-RES]  182.63,97.99 180 top
R95  10k  [0603-RES]  208.53,99.52 180 top
R96  10k  [0603-RES]  208.53,97.99 180 top
SJ1  [SJ_3_PASTE2&3]  25.91,15.75 270 top
SJ2  [SJ_2S-TRACE]  13.21,14.48 180 bottom
SJ3  [SJ_2S-TRACE]  25.91,14.48 0 bottom
SJ4  [SJ_3_PASTE2&3]  51.82,15.75 270 top
SJ5  [SJ_2S-TRACE]  51.82,14.48 0 bottom
SJ6  [SJ_2S-TRACE]  39.12,14.48 180 bottom
SJ7  [SJ_3_PASTE2&3]  77.72,15.75 270 top
SJ8  [SJ_2S-TRACE]  77.72,14.48 0 bottom
SJ9  [SJ_2S-TRACE]  65.02,14.48 180 bottom
SJ10  [SJ_3_PASTE2&3]  103.63,15.75 270 top
SJ11  [SJ_2S-TRACE]  103.63,14.48 0 bottom
SJ12  [SJ_2S-TRACE]  90.93,14.48 180 bottom
SJ13  [SJ_3_PASTE2&3]  25.91,31.5 270 top
SJ14  [SJ_2S-TRACE]  25.91,30.23 0 bottom
SJ15  [SJ_2S-TRACE]  13.21,30.23 180 bottom
SJ16  [SJ_3_PASTE2&3]  51.82,31.5 270 top
SJ17  [SJ_2S-TRACE]  51.82,30.23 0 bottom
SJ18  [SJ_2S-TRACE]  39.12,30.23 180 bottom
SJ19  [SJ_3_PASTE2&3]  77.72,31.5 270 top
SJ20  [SJ_2S-TRACE]  77.72,30.23 0 bottom
SJ21  [SJ_2S-TRACE]  65.02,30.23 180 bottom
SJ22  [SJ_3_PASTE2&3]  103.63,31.5 270 top
SJ23  [SJ_2S-TRACE]  103.63,30.23 0 bottom
SJ24  [SJ_2S-TRACE]  90.93,30.23 180 bottom
SJ25  [SJ_3_PASTE2&3]  25.91,47.24 270 top
SJ26  [SJ_2S-TRACE]  25.91,45.97 0 bottom
SJ27  [SJ_2S-TRACE]  13.21,45.97 180 bottom
SJ28  [SJ_3_PASTE2&3]  51.82,47.24 270 top
SJ29  [SJ_2S-TRACE]  51.82,45.97 0 bottom
SJ30  [SJ_2S-TRACE]  39.12,45.97 180 bottom
SJ31  [SJ_3_PASTE2&3]  77.72,47.24 270 top
SJ32  [SJ_2S-TRACE]  77.72,45.97 0 bottom
SJ33  [SJ_2S-TRACE]  65.02,45.97 180 bottom
SJ34  [SJ_3_PASTE2&3]  103.63,47.24 270 top
SJ35  [SJ_2S-TRACE]  103.63,45.97 0 bottom
SJ36  [SJ_2S-TRACE]  90.93,45.97 180 bottom
SJ37  [SJ_3_PASTE2&3]  25.91,62.99 270 top
SJ38  [SJ_2S-TRACE]  25.91,61.72 0 bottom
SJ39  [SJ_2S-TRACE]  13.21,61.72 180 bottom
SJ40  [SJ_3_PASTE2&3]  51.82,62.99 270 top
SJ41  [SJ_2S-TRACE]  51.82,61.72 0 bottom
SJ42  [SJ_2S-TRACE]  39.12,61.72 180 bottom
SJ43  [SJ_3_PASTE2&3]  77.72,62.99 270 top
SJ44  [SJ_2S-TRACE]  77.72,61.72 0 bottom
SJ45  [SJ_2S-TRACE]  65.02,61.72 180 bottom
SJ46  [SJ_3_PASTE2&3]  103.63,62.99 270 top
SJ47  [SJ_2S-TRACE]  103.63,61.72 0 bottom
SJ48  [SJ_2S-TRACE]  90.93,61.72 180 bottom
SJ49  [SJ_3_PASTE2&3]  25.91,78.74 270 top
SJ50  [SJ_2S-TRACE]  25.91,77.47 0 bottom
SJ51  [SJ_2S-TRACE]  13.21,77.47 180 bottom
SJ52  [SJ_3_PASTE2&3]  51.82,78.74 270 top
SJ53  [SJ_2S-TRACE]  51.82,77.47 0 bottom
SJ54  [SJ_2S-TRACE]  39.12,77.47 180 bottom
SJ55  [SJ_3_PASTE2&3]  77.72,78.74 270 top
SJ56  [SJ_2S-TRACE]  77.72,77.47 0 bottom
SJ57  [SJ_2S-TRACE]  65.02,77.47 180 bottom
SJ58  [SJ_3_PASTE2&3]  103.63,78.74 270 top
SJ59  [SJ_2S-TRACE]  103.63,77.47 0 bottom
SJ60  [SJ_2S-TRACE]  90.93,77.47 180 bottom
SJ61  [SJ_3_PASTE2&3]  25.91,94.49 270 top
SJ62  [SJ_2S-TRACE]  25.91,93.22 0 bottom
SJ63  [SJ_2S-TRACE]  13.21,93.22 180 bottom
SJ64  [SJ_3_PASTE2&3]  51.82,94.49 270 top
SJ65  [SJ_2S-TRACE]  51.82,93.22 0 bottom
SJ66  [SJ_2S-TRACE]  39.12,93.22 180 bottom
SJ67  [SJ_3_PASTE2&3]  77.72,94.49 270 top
SJ68  [SJ_2S-TRACE]  77.72,93.22 0 bottom
SJ69  [SJ_2S-TRACE]  65.02,93.22 180 bottom
SJ70  [SJ_3_PASTE2&3]  103.63,94.49 270 top
SJ71  [SJ_2S-TRACE]  103.63,93.22 0 bottom
SJ72  [SJ_2S-TRACE]  90.93,93.22 180 bottom
SJ73  [SJ_3_PASTE2&3]  143.26,15.75 270 top
SJ74  [SJ_2S-TRACE]  143.26,14.48 0 bottom
SJ75  [SJ_2S-TRACE]  130.56,14.48 180 bottom
SJ76  [SJ_3_PASTE2&3]  169.16,15.75 270 top
SJ77  [SJ_2S-TRACE]  169.16,14.48 0 bottom
SJ78  [SJ_2S-TRACE]  156.46,14.48 180 bottom
SJ79  [SJ_3_PASTE2&3]  195.07,15.75 270 top
SJ80  [SJ_2S-TRACE]  195.07,14.48 0 bottom
SJ81  [SJ_2S-TRACE]  182.37,14.48 180 bottom
SJ82  [SJ_3_PASTE2&3]  220.98,15.75 270 top
SJ83  [SJ_2S-TRACE]  220.98,14.48 0 bottom
SJ84  [SJ_2S-TRACE]  208.28,14.48 180 bottom
SJ85  [SJ_3_PASTE2&3]  143.26,31.5 270 top
SJ86  [SJ_2S-TRACE]  143.26,30.23 0 bottom
SJ87  [SJ_2S-TRACE]  130.56,30.23 180 bottom
SJ88  [SJ_3_PASTE2&3]  169.16,31.5 270 top
SJ89  [SJ_2S-TRACE]  169.16,30.23 0 bottom
SJ90  [SJ_2S-TRACE]  156.46,30.23 180 bottom
SJ91  [SJ_3_PASTE2&3]  195.07,31.5 270 top
SJ92  [SJ_2S-TRACE]  195.07,30.23 0 bottom
SJ93  [SJ_2S-TRACE]  182.37,30.23 180 bottom
SJ94  [SJ_3_PASTE2&3]  220.98,31.5 270 top
SJ95  [SJ_2S-TRACE]  220.98,30.23 0 bottom
SJ96  [SJ_2S-TRACE]  208.28,30.23 180 bottom
SJ97  [SJ_3_PASTE2&3]  143.26,47.24 270 top
SJ98  [SJ_2S-TRACE]  143.26,45.97 0 bottom
SJ99  [SJ_2S-TRACE]  130.56,45.97 180 bottom
SJ100  [SJ_3_PASTE2&3]  169.16,47.24 270 top
SJ101  [SJ_2S-TRACE]  169.16,45.97 0 bottom
SJ102  [SJ_2S-TRACE]  156.46,45.97 180 bottom
SJ103  [SJ_3_PASTE2&3]  195.07,47.24 270 top
SJ104  [SJ_2S-TRACE]  195.07,45.97 0 bottom
SJ105  [SJ_2S-TRACE]  182.37,45.97 180 bottom
SJ106  [SJ_3_PASTE2&3]  220.98,47.24 270 top
SJ107  [SJ_2S-TRACE]  220.98,45.97 0 bottom
SJ108  [SJ_2S-TRACE]  208.28,45.97 180 bottom
SJ109  [SJ_3_PASTE2&3]  143.26,62.99 270 top
SJ110  [SJ_2S-TRACE]  143.26,61.72 0 bottom
SJ111  [SJ_2S-TRACE]  130.56,61.72 180 bottom
SJ112  [SJ_3_PASTE2&3]  169.16,62.99 270 top
SJ113  [SJ_2S-TRACE]  169.16,61.72 0 bottom
SJ114  [SJ_2S-TRACE]  156.46,61.72 180 bottom
SJ115  [SJ_3_PASTE2&3]  195.07,62.99 270 top
SJ116  [SJ_2S-TRACE]  195.07,61.72 0 bottom
SJ117  [SJ_2S-TRACE]  182.37,61.72 180 bottom
SJ118  [SJ_3_PASTE2&3]  220.98,62.99 270 top
SJ119  [SJ_2S-TRACE]  220.98,61.72 0 bottom
SJ120  [SJ_2S-TRACE]  208.28,61.72 180 bottom
SJ121  [SJ_3_PASTE2&3]  143.26,78.74 270 top
SJ122  [SJ_2S-TRACE]  143.26,77.47 0 bottom
SJ123  [SJ_2S-TRACE]  130.56,77.47 180 bottom
SJ124  [SJ_3_PASTE2&3]  169.16,78.74 270 top
SJ125  [SJ_2S-TRACE]  169.16,77.47 0 bottom
SJ126  [SJ_2S-TRACE]  156.46,77.47 180 bottom
SJ127  [SJ_3_PASTE2&3]  195.07,78.74 270 top
SJ128  [SJ_2S-TRACE]  195.07,77.47 0 bottom
SJ129  [SJ_2S-TRACE]  182.37,77.47 180 bottom
SJ130  [SJ_3_PASTE2&3]  220.98,78.74 270 top
SJ131  [SJ_2S-TRACE]  220.98,77.47 0 bottom
SJ132  [SJ_2S-TRACE]  208.28,77.47 180 bottom
SJ133  [SJ_3_PASTE2&3]  143.26,94.49 270 top
SJ134  [SJ_2S-TRACE]  143.26,93.22 0 bottom
SJ135  [SJ_2S-TRACE]  130.56,93.22 180 bottom
SJ136  [SJ_3_PASTE2&3]  169.16,94.49 270 top
SJ137  [SJ_2S-TRACE]  169.16,93.22 0 bottom
SJ138  [SJ_2S-TRACE]  156.46,93.22 180 bottom
SJ139  [SJ_3_PASTE2&3]  195.07,94.49 270 top
SJ140  [SJ_2S-TRACE]  195.07,93.22 0 bottom
SJ141  [SJ_2S-TRACE]  182.37,93.22 180 bottom
SJ142  [SJ_3_PASTE2&3]  220.98,94.49 270 top
SJ143  [SJ_2S-TRACE]  220.98,93.22 0 bottom
SJ144  [SJ_2S-TRACE]  208.28,93.22 180 bottom
U1  MPU-6050-1  [QFN-24-4MM2]  19.56,17.02 0 top
U2  MPU-6050-1  [QFN-24-4MM2]  45.47,17.02 0 top
U3  MPU-6050-1  [QFN-24-4MM2]  71.37,17.02 0 top
U4  MPU-6050-1  [QFN-24-4MM2]  97.28,17.02 0 top
U5  MPU-6050-1  [QFN-24-4MM2]  19.56,32.77 0 top
U6  MPU-6050-1  [QFN-24-4MM2]  45.47,32.77 0 top
U7  MPU-6050-1  [QFN-24-4MM2]  71.37,32.77 0 top
U8  MPU-6050-1  [QFN-24-4MM2]  97.28,32.77 0 top
U9  MPU-6050-1  [QFN-24-4MM2]  19.56,48.51 0 top
U10  MPU-6050-1  [QFN-24-4MM2]  45.47,48.51 0 top
U11  MPU-6050-1  [QFN-24-4MM2]  71.37,48.51 0 top
U12  MPU-6050-1  [QFN-24-4MM2]  97.28,48.51 0 top
U13  MPU-6050-1  [QFN-24-4MM2]  19.56,64.26 0 top
U14  MPU-6050-1  [QFN-24-4MM2]  45.47,64.26 0 top
U15  MPU-6050-1  [QFN-24-4MM2]  71.37,64.26 0 top
U16  MPU-6050-1  [QFN-24-4MM2]  97.28,64.26 0 top
U17  MPU-6050-1  [QFN-24-4MM2]  19.56,80.01 0 top
U18  MPU-6050-1  [QFN-24-4MM2]  45.47,80.01 0 top
U19  MPU-6050-1  [QFN-24-4MM2]  71.37,80.01 0 top
U20  MPU-6050-1  [QFN-24-4MM2]  97.28,80.01 0 top
U21  MPU-6050-1  [QFN-24-4MM2]  19.56,95.76 0 top
U22  MPU-6050-1  [QFN-24-4MM2]  45.47,95.76 0 top
U23  MPU-6050-1  [QFN-24-4MM2]  71.37,95.76 0 top
U24  MPU-6050-1  [QFN-24-4MM2]  97.28,95.76 0 top
U25  MPU-6050-1  [QFN-24-4MM2]  136.91,17.02 0 top
U26  MPU-6050-1  [QFN-24-4MM2]  162.81,17.02 0 top
U27  MPU-6050-1  [QFN-24-4MM2]  188.72,17.02 0 top
U28  MPU-6050-1  [QFN-24-4MM2]  214.63,17.02 0 top
U29  MPU-6050-1  [QFN-24-4MM2]  136.91,32.77 0 top
U30  MPU-6050-1  [QFN-24-4MM2]  162.81,32.77 0 top
U31  MPU-6050-1  [QFN-24-4MM2]  188.72,32.77 0 top
U32  MPU-6050-1  [QFN-24-4MM2]  214.63,32.77 0 top
U33  MPU-6050-1  [QFN-24-4MM2]  136.91,48.51 0 top
U34  MPU-6050-1  [QFN-24-4MM2]  162.81,48.51 0 top
U35  MPU-6050-1  [QFN-24-4MM2]  188.72,48.51 0 top
U36  MPU-6050-1  [QFN-24-4MM2]  214.63,48.51 0 top
U37  MPU-6050-1  [QFN-24-4MM2]  136.91,64.26 0 top
U38  MPU-6050-1  [QFN-24-4MM2]  162.81,64.26 0 top
U39  MPU-6050-1  [QFN-24-4MM2]  188.72,64.26 0 top
U40  MPU-6050-1  [QFN-24-4MM2]  214.63,64.26 0 top
U41  MPU-6050-1  [QFN-24-4MM2]  136.91,80.01 0 top
U42  MPU-6050-1  [QFN-24-4MM2]  162.81,80.01 0 top
U43  MPU-6050-1  [QFN-24-4MM2]  188.72,80.01 0 top
U44  MPU-6050-1  [QFN-24-4MM2]  214.63,80.01 0 top
U45  MPU-6050-1  [QFN-24-4MM2]  136.91,95.76 0 top
U46  MPU-6050-1  [QFN-24-4MM2]  162.81,95.76 0 top
U47  MPU-6050-1  [QFN-24-4MM2]  188.72,95.76 0 top
U48  MPU-6050-1  [QFN-24-4MM2]  214.63,95.76 0 top
U$1  OSHW-LOGOS  [OSHW-LOGO-S]  19.56,14.48 180 bottom
U$2  [SFE-LOGO-FLAME]  23.7,21.29 270 top
U$3  [SFE-LOGO-FLAME]  24.64,20.83 180 bottom
U$4  [SFE-NEW-WEB]  11.94,20.83 180 bottom
U$5  [SFE-LOGO-FLAME]  50.55,20.83 180 bottom
U$6  OSHW-LOGOS  [OSHW-LOGO-S]  45.47,14.48 180 bottom
U$7  [SFE-LOGO-FLAME]  49.61,21.29 270 top
U$8  [SFE-NEW-WEB]  37.85,20.83 180 bottom
U$9  [SFE-LOGO-FLAME]  76.45,20.83 180 bottom
U$10  OSHW-LOGOS  [OSHW-LOGO-S]  71.37,14.48 180 bottom
U$11  [SFE-LOGO-FLAME]  75.51,21.29 270 top
U$12  [SFE-NEW-WEB]  63.75,20.83 180 bottom
U$13  [SFE-LOGO-FLAME]  102.36,20.83 180 bottom
U$14  OSHW-LOGOS  [OSHW-LOGO-S]  97.28,14.48 180 bottom
U$15  [SFE-LOGO-FLAME]  101.42,21.29 270 top
U$16  [SFE-NEW-WEB]  89.66,20.83 180 bottom
U$17  [SFE-LOGO-FLAME]  24.64,36.58 180 bottom
U$18  OSHW-LOGOS  [OSHW-LOGO-S]  19.56,30.23 180 bottom
U$19  [SFE-LOGO-FLAME]  23.7,37.03 270 top
U$20  [SFE-NEW-WEB]  11.94,36.58 180 bottom
U$21  [SFE-LOGO-FLAME]  50.55,36.58 180 bottom
U$22  OSHW-LOGOS  [OSHW-LOGO-S]  45.47,30.23 180 bottom
U$23  [SFE-LOGO-FLAME]  49.61,37.03 270 top
U$24  [SFE-NEW-WEB]  37.85,36.58 180 bottom
U$25  [SFE-LOGO-FLAME]  76.45,36.58 180 bottom
U$26  OSHW-LOGOS  [OSHW-LOGO-S]  71.37,30.23 180 bottom
U$27  [SFE-LOGO-FLAME]  75.51,37.03 270 top
U$28  [SFE-NEW-WEB]  63.75,36.58 180 bottom
U$29  [SFE-LOGO-FLAME]  102.36,36.58 180 bottom
U$30  OSHW-LOGOS  [OSHW-LOGO-S]  97.28,30.23 180 bottom
U$31  [SFE-LOGO-FLAME]  101.42,37.03 270 top
U$32  [SFE-NEW-WEB]  89.66,36.58 180 bottom
U$33  [SFE-LOGO-FLAME]  24.64,52.32 180 bottom
U$34  OSHW-LOGOS  [OSHW-LOGO-S]  19.56,45.97 180 bottom
U$35  [SFE-LOGO-FLAME]  23.7,52.78 270 top
U$36  [SFE-NEW-WEB]  11.94,52.32 180 bottom
U$37  [SFE-LOGO-FLAME]  50.55,52.32 180 bottom
U$38  OSHW-LOGOS  [OSHW-LOGO-S]  45.47,45.97 180 bottom
U$39  [SFE-LOGO-FLAME]  49.61,52.78 270 top
U$40  [SFE-NEW-WEB]  37.85,52.32 180 bottom
U$41  [SFE-LOGO-FLAME]  76.45,52.32 180 bottom
U$42  OSHW-LOGOS  [OSHW-LOGO-S]  71.37,45.97 180 bottom
U$43  [SFE-LOGO-FLAME]  75.51,52.78 270 top
U$44  [SFE-NEW-WEB]  63.75,52.32 180 bottom
U$45  [SFE-LOGO-FLAME]  102.36,52.32 180 bottom
U$46  OSHW-LOGOS  [OSHW-LOGO-S]  97.28,45.97 180 bottom
U$47  [SFE-LOGO-FLAME]  101.42,52.78 270 top
U$48  [SFE-NEW-WEB]  89.66,52.32 180 bottom
U$49  [SFE-LOGO-FLAME]  24.64,68.07 180 bottom
U$50  OSHW-LOGOS  [OSHW-LOGO-S]  19.56,61.72 180 bottom
U$51  [SFE-LOGO-FLAME]  23.7,68.53 270 top
U$52  [SFE-NEW-WEB]  11.94,68.07 180 bottom
U$53  [SFE-LOGO-FLAME]  50.55,68.07 180 bottom
U$54  OSHW-LOGOS  [OSHW-LOGO-S]  45.47,61.72 180 bottom
U$55  [SFE-LOGO-FLAME]  49.61,68.53 270 top
U$56  [SFE-NEW-WEB]  37.85,68.07 180 bottom
U$57  [SFE-LOGO-FLAME]  76.45,68.07 180 bottom
U$58  OSHW-LOGOS  [OSHW-LOGO-S]  71.37,61.72 180 bottom
U$59  [SFE-LOGO-FLAME]  75.51,68.53 270 top
U$60  [SFE-NEW-WEB]  63.75,68.07 180 bottom
U$61  [SFE-LOGO-FLAME]  102.36,68.07 180 bottom
U$62  OSHW-LOGOS  [OSHW-LOGO-S]  97.28,61.72 180 bottom
U$63  [SFE-LOGO-FLAME]  101.42,68.53 270 top
U$64  [SFE-NEW-WEB]  89.66,68.07 180 bottom
U$65  [SFE-LOGO-FLAME]  24.64,83.82 180 bottom
U$66  OSHW-LOGOS  [OSHW-LOGO-S]  19.56,77.47 180 bottom
U$67  [SFE-LOGO-FLAME]  23.7,84.28 270 top
U$68  [SFE-NEW-WEB]  11.94,83.82 180 bottom
U$69  [SFE-LOGO-FLAME]  50.55,83.82 180 bottom
U$70  OSHW-LOGOS  [OSHW-LOGO-S]  45.47,77.47 180 bottom
U$71  [SFE-LOGO-FLAME]  49.61,84.28 270 top
U$72  [SFE-NEW-WEB]  37.85,83.82 180 bottom
U$73  [SFE-LOGO-FLAME]  76.45,83.82 180 bottom
U$74  OSHW-LOGOS  [OSHW-LOGO-S]  71.37,77.47 180 bottom
U$75  [SFE-LOGO-FLAME]  75.51,84.28 270 top
U$76  [SFE-NEW-WEB]  63.75,83.82 180 bottom
U$77  [SFE-LOGO-FLAME]  102.36,83.82 180 bottom
U$78  OSHW-LOGOS  [OSHW-LOGO-S]  97.28,77.47 180 bottom
U$79  [SFE-LOGO-FLAME]  101.42,84.28 270 top
U$80  [SFE-NEW-WEB]  89.66,83.82 180 bottom
U$81  [SFE-LOGO-FLAME]  24.64,99.57 180 bottom
U$82  OSHW-LOGOS  [OSHW-LOGO-S]  19.56,93.22 180 bottom
U$83  [SFE-LOGO-FLAME]  23.7,100.03 270 top
U$84  [SFE-NEW-WEB]  11.94,99.57 180 bottom
U$85  [SFE-LOGO-FLAME]  50.55,99.57 180 bottom
U$86  OSHW-LOGOS  [OSHW-LOGO-S]  45.47,93.22 180 bottom
U$87  [SFE-LOGO-FLAME]  49.61,100.03 270 top
U$88  [SFE-NEW-WEB]  37.85,99.57 180 bottom
U$89  [SFE-LOGO-FLAME]  76.45,99.57 180 bottom
U$90  OSHW-LOGOS  [OSHW-LOGO-S]  71.37,93.22 180 bottom
U$91  [SFE-LOGO-FLAME]  75.51,100.03 270 top
U$92  [SFE-NEW-WEB]  63.75,99.57 180 bottom
U$93  [SFE-LOGO-FLAME]  102.36,99.57 180 bottom
U$94  OSHW-LOGOS  [OSHW-LOGO-S]  97.28,93.22 180 bottom
U$95  [SFE-LOGO-FLAME]  101.42,100.03 270 top
U$96  [SFE-NEW-WEB]  89.66,99.57 180 bottom
U$97  [SFE-LOGO-FLAME]  141.99,20.83 180 bottom
U$98  OSHW-LOGOS  [OSHW-LOGO-S]  136.91,14.48 180 bottom
U$99  [SFE-LOGO-FLAME]  141.05,21.29 270 top
U$100  [SFE-NEW-WEB]  129.29,20.83 180 bottom
U$101  [SFE-LOGO-FLAME]  167.89,20.83 180 bottom
U$102  OSHW-LOGOS  [OSHW-LOGO-S]  162.81,14.48 180 bottom
U$103  [SFE-LOGO-FLAME]  166.95,21.29 270 top
U$104  [SFE-NEW-WEB]  155.19,20.83 180 bottom
U$105  [SFE-LOGO-FLAME]  193.8,20.83 180 bottom
U$106  OSHW-LOGOS  [OSHW-LOGO-S]  188.72,14.48 180 bottom
U$107  [SFE-LOGO-FLAME]  192.86,21.29 270 top
U$108  [SFE-NEW-WEB]  181.1,20.83 180 bottom
U$109  [SFE-LOGO-FLAME]  219.71,20.83 180 bottom
U$110  OSHW-LOGOS  [OSHW-LOGO-S]  214.63,14.48 180 bottom
U$111  [SFE-LOGO-FLAME]  218.77,21.29 270 top
U$112  [SFE-NEW-WEB]  207.01,20.83 180 bottom
U$113  [SFE-LOGO-FLAME]  141.99,36.58 180 bottom
U$114  OSHW-LOGOS  [OSHW-LOGO-S]  136.91,30.23 180 bottom
U$115  [SFE-LOGO-FLAME]  141.05,37.03 270 top
U$116  [SFE-NEW-WEB]  129.29,36.58 180 bottom
U$117  [SFE-LOGO-FLAME]  167.89,36.58 180 bottom
U$118  OSHW-LOGOS  [OSHW-LOGO-S]  162.81,30.23 180 bottom
U$119  [SFE-LOGO-FLAME]  166.95,37.03 270 top
U$120  [SFE-NEW-WEB]  155.19,36.58 180 bottom
U$121  [SFE-LOGO-FLAME]  193.8,36.58 180 bottom
U$122  OSHW-LOGOS  [OSHW-LOGO-S]  188.72,30.23 180 bottom
U$123  [SFE-LOGO-FLAME]  192.86,37.03 270 top
U$124  [SFE-NEW-WEB]  181.1,36.58 180 bottom
U$125  [SFE-LOGO-FLAME]  219.71,36.58 180 bottom
U$126  OSHW-LOGOS  [OSHW-LOGO-S]  214.63,30.23 180 bottom
U$127  [SFE-LOGO-FLAME]  218.77,37.03 270 top
U$128  [SFE-NEW-WEB]  207.01,36.58 180 bottom
U$129  [SFE-LOGO-FLAME]  141.99,52.32 180 bottom
U$130  OSHW-LOGOS  [OSHW-LOGO-S]  136.91,45.97 180 bottom
U$131  [SFE-LOGO-FLAME]  141.05,52.78 270 top
U$132  [SFE-NEW-WEB]  129.29,52.32 180 bottom
U$133  [SFE-LOGO-FLAME]  167.89,52.32 180 bottom
U$134  OSHW-LOGOS  [OSHW-LOGO-S]  162.81,45.97 180 bottom
U$135  [SFE-LOGO-FLAME]  166.95,52.78 270 top
U$136  [SFE-NEW-WEB]  155.19,52.32 180 bottom
U$137  [SFE-LOGO-FLAME]  193.8,52.32 180 bottom
U$138  OSHW-LOGOS  [OSHW-LOGO-S]  188.72,45.97 180 bottom
U$139  [SFE-LOGO-FLAME]  192.86,52.78 270 top
U$140  [SFE-NEW-WEB]  181.1,52.32 180 bottom
U$141  [SFE-LOGO-FLAME]  219.71,52.32 180 bottom
U$142  OSHW-LOGOS  [OSHW-LOGO-S]  214.63,45.97 180 bottom
U$143  [SFE-LOGO-FLAME]  218.77,52.78 270 top
U$144  [SFE-NEW-WEB]  207.01,52.32 180 bottom
U$145  [SFE-LOGO-FLAME]  141.99,68.07 180 bottom
U$146  OSHW-LOGOS  [OSHW-LOGO-S]  136.91,61.72 180 bottom
U$147  [SFE-LOGO-FLAME]  141.05,68.53 270 top
U$148  [SFE-NEW-WEB]  129.29,68.07 180 bottom
U$149  [SFE-LOGO-FLAME]  167.89,68.07 180 bottom
U$150  OSHW-LOGOS  [OSHW-LOGO-S]  162.81,61.72 180 bottom
U$151  [SFE-LOGO-FLAME]  166.95,68.53 270 top
U$152  [SFE-NEW-WEB]  155.19,68.07 180 bottom
U$153  [SFE-LOGO-FLAME]  193.8,68.07 180 bottom
U$154  OSHW-LOGOS  [OSHW-LOGO-S]  188.72,61.72 180 bottom
U$155  [SFE-LOGO-FLAME]  192.86,68.53 270 top
U$156  [SFE-NEW-WEB]  181.1,68.07 180 bottom
U$157  [SFE-LOGO-FLAME]  219.71,68.07 180 bottom
U$158  OSHW-LOGOS  [OSHW-LOGO-S]  214.63,61.72 180 bottom
U$159  [SFE-LOGO-FLAME]  218.77,68.53 270 top
U$160  [SFE-NEW-WEB]  207.01,68.07 180 bottom
U$161  [SFE-LOGO-FLAME]  141.99,83.82 180 bottom
U$162  OSHW-LOGOS  [OSHW-LOGO-S]  136.91,77.47 180 bottom
U$163  [SFE-LOGO-FLAME]  141.05,84.28 270 top
U$164  [SFE-NEW-WEB]  129.29,83.82 180 bottom
U$165  [SFE-LOGO-FLAME]  167.89,83.82 180 bottom
U$166  OSHW-LOGOS  [OSHW-LOGO-S]  162.81,77.47 180 bottom
U$167  [SFE-LOGO-FLAME]  166.95,84.28 270 top
U$168  [SFE-NEW-WEB]  155.19,83.82 180 bottom
U$169  [SFE-LOGO-FLAME]  193.8,83.82 180 bottom
U$170  OSHW-LOGOS  [OSHW-LOGO-S]  188.72,77.47 180 bottom
U$171  [SFE-LOGO-FLAME]  192.86,84.28 270 top
U$172  [SFE-NEW-WEB]  181.1,83.82 180 bottom
U$173  [SFE-LOGO-FLAME]  219.71,83.82 180 bottom
U$174  OSHW-LOGOS  [OSHW-LOGO-S]  214.63,77.47 180 bottom
U$175  [SFE-LOGO-FLAME]  218.77,84.28 270 top
U$176  [SFE-NEW-WEB]  207.01,83.82 180 bottom
U$177  [SFE-LOGO-FLAME]  141.99,99.57 180 bottom
U$178  OSHW-LOGOS  [OSHW-LOGO-S]  136.91,93.22 180 bottom
U$179  [SFE-LOGO-FLAME]  141.05,100.03 270 top
U$180  [SFE-NEW-WEB]  129.29,99.57 180 bottom
U$181  [SFE-LOGO-FLAME]  167.89,99.57 180 bottom
U$182  OSHW-LOGOS  [OSHW-LOGO-S]  162.81,93.22 180 bottom
U$183  [SFE-LOGO-FLAME]  166.95,100.03 270 top
U$184  [SFE-NEW-WEB]  155.19,99.57 180 bottom
U$185  [SFE-LOGO-FLAME]  193.8,99.57 180 bottom
U$186  OSHW-LOGOS  [OSHW-LOGO-S]  188.72,93.22 180 bottom
U$187  [SFE-LOGO-FLAME]  192.86,100.03 270 top
U$188  [SFE-NEW-WEB]  181.1,99.57 180 bottom
U$189  [SFE-LOGO-FLAME]  219.71,99.57 180 bottom
U$190  OSHW-LOGOS  [OSHW-LOGO-S]  214.63,93.22 180 bottom
U$191  [SFE-LOGO-FLAME]  218.77,100.03 270 top
U$192  [SFE-NEW-WEB]  207.01,99.57 180 bottom

## Library data of the parts
C1-C192 JP1-JP240 R1-R96 SJ1-SJ144 U$1-U$192 = SparkFun
E$1-E$6 = SparkFun-Aesthetics
U1-U48 = Testing